# Altium PCB PCB3.PcbDoc
Units mm, origin at the board's own origin, x right, y up, seen from the top; angles counter-clockwise.
Board outline 19.13 x 24.3 mm, 2 copper layers (Top Layer, Bottom Layer); 16 components, 22 nets, 63 pads, 50 vias.
Unrouted connection lines stored in the file: 19.
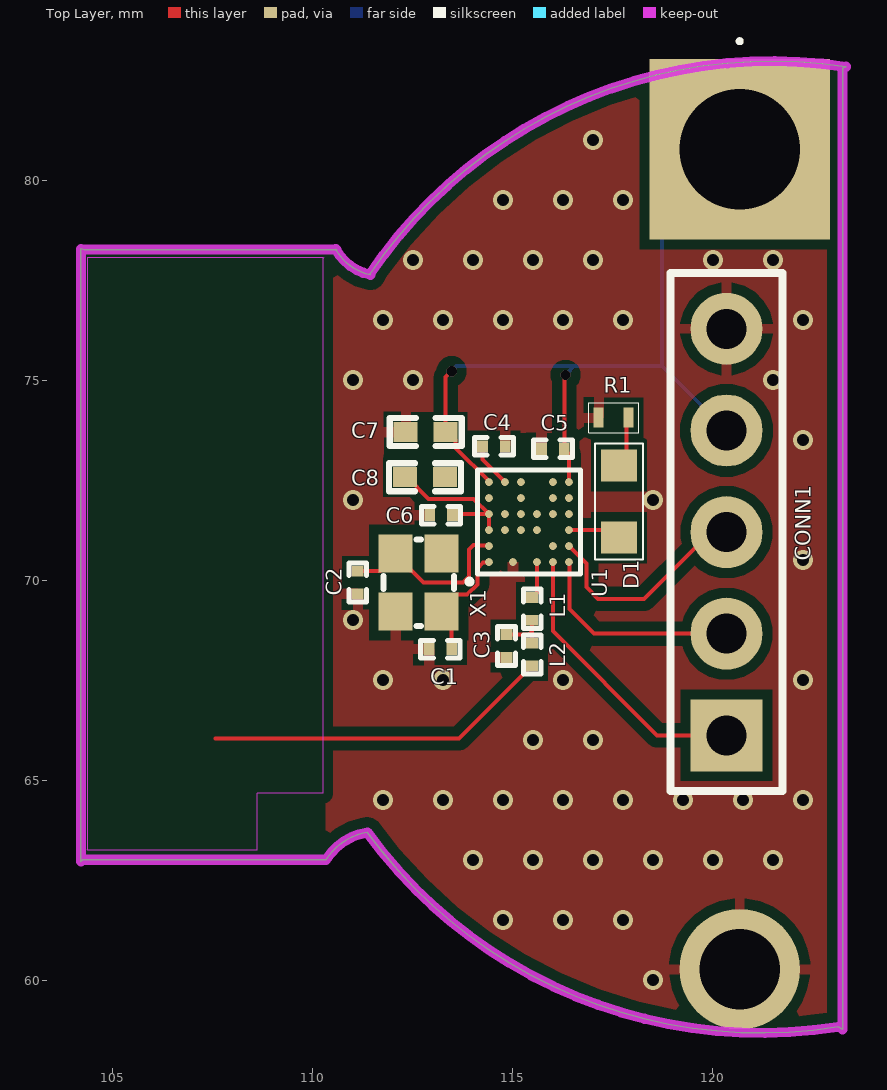
[diagram p0: Top Layer view]
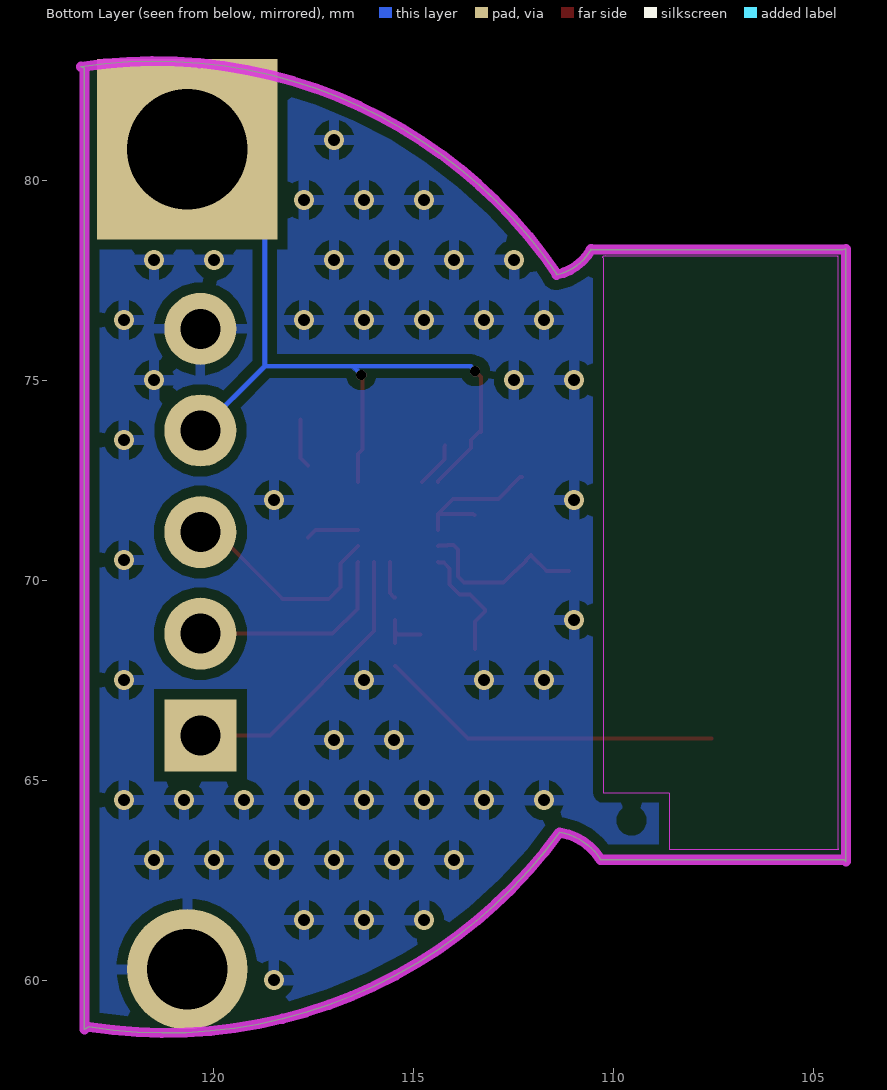
[diagram p1: Bottom Layer view, seen from below]
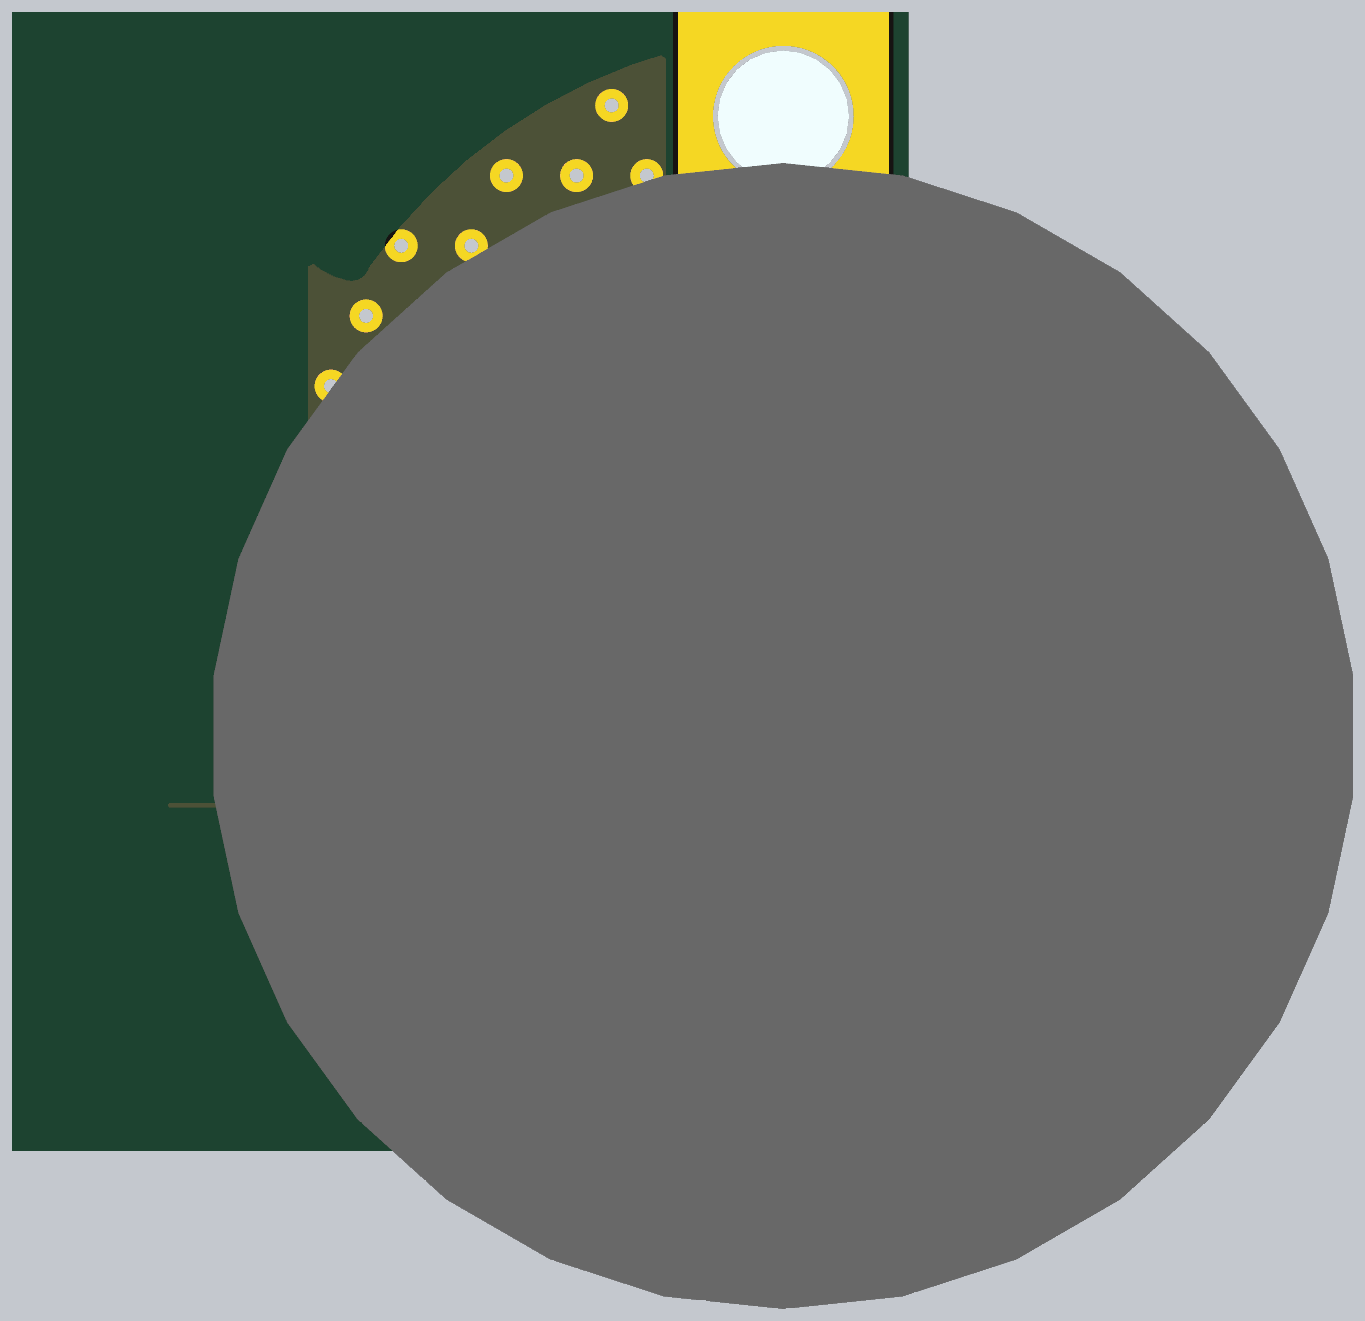
[diagram p2: 3D render of the assembled board from above, using the file's embedded part models]

## Layer stack, top to bottom
Top Solder: solder mask 0.0102, Solder Resist, Dk 3.5
Top Layer: signal copper 0.0356
Dielectric 1: dielectric 0.32, FR-4, Dk 4.8
Bottom Layer: signal copper 0.0356
Bottom Solder: solder mask 0.0102, Solder Resist, Dk 3.5

## Board outline
110.328,63.008 cw(c111.595,62.213) 111.36,63.69 ccw(c121.209,70.857) 123.123,58.828 123.24,58.77 123.24,82.8 123.325,82.83 ccw(c121.472,70.827) 111.426,77.653 111.437,77.634 cw(c111.69,78.89) 110.569,78.269 110.59,78.26 104.28,78.26 104.2,78.28 104.2,62.96 104.248,63.008

## Design rules (kind name [scope] priority, off if disabled: settings)
Clearance [All] p1: gap=0.254 ignorepadtopadclearanceinfootprint=FALSE except(0: Arc-Hole Track-Hole SMDPad-Hole THPad-Hole Via-Hole Fill-Hole Poly-Hole Region-Hole Text-Hole; 0.01: Arc-Arc Arc-Track Arc-SMDPad Track-Track Track-SMDPad SMDPad-SMDPad)
PolygonConnect [All] p1: connectstyle=Relief reliefconductorwidth=0.254 reliefentries=4 polygonreliefangle="90 Angle" airgapwidth=0.254
RoutingVias [All] p1: holewidth=0.3 width=0.5 viastyle="Through Hole" minholewidth=0.3 minwidth=0.4 maxholewidth=0.711 maxwidth=1.27
SolderMaskExpansion [All] p1: expansion=0.102 istentingtop=FALSE
Width [All] p1: maxlimit=0.2 minlimit=0.1 preferedwidth=0.1 minimp=50.000000 maximp=50.000000 favimp=50.000000
30 further rules are at their usual default settings.

## Classes and differential pairs
component class BLE_Schematic: C1 C2 C3 C4 C5 C6 C7 C8 CONN1 D1 L1 L2 R1 U1 X1

## Components (designator, comment, footprint, x,y, rotation, side; value= is the part's Value field where it differs from the comment)
BT1 "CR2477-HFN" CR2477HFN 120.67,80.77 r90 top locked
C1 "12pF" CAPC0603X03L_C 113.185,68.27 r180 top
C2 "12pF" CAPC0603X03L_C 111.12,69.935 r270 top
C3 "12pF" CAPC0603X03L_C 114.84,68.35 r90 top
C4 "12pF" CAPC0603X03L_C 114.525,73.34 r180 top
C5 "12pF" CAPC0603X03L_C 116,73.279 r0 top
C6 "12pF" CAPC0603X03L_C 113.205,71.62 r0 top
C7 "2.2µF" CAPC1005X04L 112.82,73.7 r0 top
C8 "2.2µF" CAPC1005X04L 112.8,72.57 r180 top
CONN1 "Connector" "1x5x2.54 Pin Header TH V" 120.34,71.199 r90 top
D1 "Led_red" Led_smd_red 117.65,71.959 r90 top
L1 "2.2nH" INDC0603X03L_C 115.479,69.281 r270 top
L2 "2.2nH" INDC0603X03L_C 115.479,68.138 r270 top
R1 "330" Resistor_0402 117.52,74.06 r180 top
U1 "" BGA28C40P6X6_247X246X50 115.4,71.45 r90 top value=nRF52805-CAAA
X1 "32MHz" BT-XTAL_2016 112.645,69.935 r90 top

## Footprints (in the part's own frame and the unit in brackets; to place one, negate y for a bottom-side part, rotate by r counter-clockwise, add the part's x,y. Pads: shape width x height; smd on the part's side, far side on the other; paste and mask are expansions set on the pad)
"1x5x2.54 Pin Header TH V" [mm] "1x5x2.54 Pin Header TH V"
  rect 1.8x1.8 hole 1: 1(-5.08,0)
  round 1.8 hole 1: 2(-2.54,0) 3(0,0) 4(2.54,0) 5(5.08,0)
  silkscreen extent -6.48,-1.4 6.48,1.4, body extent -6.35,-1.27 6.35,1.27, height 8.55
BGA28C40P6X6_247X246X50 [mm]
  round 0.194 smd mask+0.05: A1(-1,1) A2(-0.6,1) A3(-0.2,1) A4(0.2,1) A5(0.6,1) A6(1,1) B3(-0.2,0.6) B4(0.2,0.6) B6(1,0.6) C1(-1,0.4) D3(-0.2,0.2) D4(0.2,0.2) D5(0.6,0.2) D6(1,0.2) E1(-1,-0.2) E3(-0.2,-0.2) E4(0.2,-0.2) F1(-1,-0.6) F2(-0.6,-0.6) F4(0.2,-0.6) F5(0.6,-0.6) F6(1,-0.6) G1(-1,-1) G2(-0.6,-1) G3(-0.2,-1) G4(0.2,-1) G5(0.6,-1) G6(1,-1)
  silkscreen extent -1.55,-1.29 1.3,1.55, body extent -1.23,-1.23 1.23,1.23, height 0.5
BT-XTAL_2016 [mm]
  rect 0.95x0.85 smd: 1(-0.725,-0.575) 2(0.725,-0.575) 3(0.725,0.575) 4(-0.725,0.575)
  silkscreen extent -1.08,-0.88 1.08,0.88, body extent -1.05,-0.85 1.05,0.85, height 0.56
CAPC0603X03L_C [mm]
  rect 0.27x0.3 smd: 1(-0.285,0) 2(0.285,0)
  silkscreen extent -0.49,-0.22 0.49,0.22, body extent -0.3,-0.15 0.31,0.15, height 0.3
CAPC1005X04L [mm]
  rect 0.6x0.5 smd: 1(-0.5,0) 2(0.5,0)
  silkscreen extent -0.9,-0.35 0.9,0.35, body extent -0.51,-0.25 0.51,0.25, height 0.5
CR2477HFN [mm]
  rect 4.515x4.515 hole 3.01: 1(0,0)
  round 3.015 hole 2.01: 2(-20.5,0)
  silkscreen extent 2.65,-0.05 2.75,0.05, body extent -25.5,-12.25 1.41,12.25, height 8.9
INDC0603X03L_C [mm]
  rect 0.27x0.3 smd: 1(-0.285,0) 2(0.285,0)
  silkscreen extent -0.49,-0.22 0.49,0.22, body extent -0.31,-0.16 0.31,0.16, height 0.26
Led_smd_red [mm]
  rect 0.8x0.9 smd: 1(0.9,0) 2(-0.9,0)
  silkscreen extent -1.45,-0.6 1.45,0.6
Resistor_0402 [mm] "0402"
  rect 0.25x0.5 smd: 1(-0.375,0) 2(0.375,0)
  silkscreen extent -0.63,-0.38 0.63,0.38

## Part data
BT1: "Battery", Manufacturer_Name=METREL, Datasheet Link=https://docs.rs-online.com/9312/0900766b8061c9c3.pdf, Height=8.8mm, Manufacturer_Part_Number=CR2477-HFN
C1 C2 C3 C4 C5 C6: library part CAP_0201, "Capacitor, NP0, ±2%", Part Number=C0201-12p, Footprint Doc=0201, LatestRevisionDate=2017-11-09, Pin Count=2, Published=2014-11-13, Publisher="Nordic Semiconductor"
C7 C8: library part CAP_0402, "Capacitor, X5R, ±20%", Part Number=C0402-2µ2, Footprint Doc=0402, LatestRevisionDate=2006-06-02, Pin Count=2, Published=2009-05-08, Publisher="Nordic Semiconductor"
CONN1: library part "Header 1x5"
L1 L2: library part IND_0201, "High frequency chip inductor ±5%", Part Number=L0201-2n2, Footprint Doc=0201, LatestRevisionDate=2013-04-10, Pin Count=2, Published=2013-04-10, Publisher="Nordic Semiconductor"
R1: library part Resistor
U1: library part nRF52805_CAAA, "Multi-protocol Bluetooth Low Energy, IEEE 802.15.4, ANT and 2.4GHz proprietary system-on-chip", Manufacturer="Nordic Semiconductor", Manufacturer Part Number=nRF52805-CAAA, Footprint Doc=WLCSP-28, LatestRevisionDate=2018-11-28, Part Number=nRF52805-CAAA, Pin Count=28, Published=2018-11-28, Publisher="Nordic Semiconductor"
X1: library part XTAL_SMD2016, "XTAL SMD 2016, 32MHz, Cl=8pF, Total Tol: ±40ppm", Part Number=XTAL_SMD2016_32MHz_8pF_General, Footprint Doc=XTAL_2016, LatestRevisionDate=2016-08-19, Pin Count=4, Published=2016-08-19, Publisher="Nordic Semiconductor"

## Via types
v1: diameter 0.5, hole 0.3, Top Layer to Bottom Layer, 48 vias
v2: diameter 0.254, hole 0.254, Top Layer to Bottom Layer, 2 vias

## Nets (pads, with @x,y where several pads share a name; then routed paths per layer and width w, separated by ;. In a path a pad name is that pad's centre, name@x,y a point inside that pad or via, vN(x,y) a via of type N, cw(c..) or ccw(c..) an arc to the next point about the centre after c; other vN are vias at no path point)
DEC1: C4.2 U1.B6 | length 1.2
  Top Layer w0.1: C4.2@114.22,73.36 C4.2 114.24,73.01 U1.B6
DEC4: C6.2 C8.2 U1.A3 U1.A4 | length 3.8
  Top Layer w0.1: C8.2 112.35,72.57 112.89,72.03 114.02,72.03 U1.A4 ; C6.2 113.52,71.65 U1.A4 ; U1.A3 U1.A4
GND: BT1.2 C1.2 C2.2 C3.1 C4.1 C5.1 C6.1 C7.1 C8.1 CONN1.5 R1.2 U1.B3 U1.B4 U1.C1 U1.D3 U1.D4 U1.E3 U1.E4 X1.2 X1.4
  other v1: 118.5,60 114.75,61.5 116.25,61.5 117.75,61.5 114,63 115.5,63 117,63 118.5,63 120,63 121.5,63 111.75,64.5 113.25,64.5 114.75,64.5 116.25,64.5 117.75,64.5 119.25,64.5 120.75,64.5 122.25,64.5 115.5,66 117,66 111.75,67.5 113.25,67.5 116.25,67.5 122.25,67.5 111,69 122.25,70.5 111,72 118.5,72 122.25,73.5 111,75 112.5,75 121.5,75 111.75,76.5 113.25,76.5 114.75,76.5 116.25,76.5 117.75,76.5 122.25,76.5 112.5,78 114,78 115.5,78 117,78 120,78 121.5,78 114.75,79.5 116.25,79.5 117.75,79.5 117,81
NetC3_2: C3.2 L1.2 L2.1 | length 1.2
  Top Layer w0.1: C3.2 115.405,68.635 115.479,68.71 ; L2.1 115.479,68.71 ; L1.2 115.479,68.71
NetD1_1: D1.1 R1.1 | length 1.2
  Top Layer w0.1: D1.1 117.84,73.049 R1.1@117.84,74.009
NetL1_1: L1.1 U1.E1 | length 0.9
  Top Layer w0.1: L1.1 115.494,69.566 115.6,69.672 U1.E1
P0.00/XL1: U1.D6
P0.01/XL2: U1.D5
P0.04/AIN2: U1.F5
P0.05/AIN3: U1.F6
P0.12: U1.G5
P0.14: U1.F4
P0.16: U1.G4
P0.18: D1.2 U1.G3 | length 1.3
  Top Layer w0.1: U1.G3 117.459,71.25 D1.2
P0.20: U1.F2
P0.21/RESET: CONN1.3 U1.G2 | length 5.5
  Top Layer w0.1: U1.G2 116.84,70.41 116.84,69.82 117.13,69.53 118.28,69.53 119.949,71.199 CONN1.3
RF: L2.2 | length 8.7
  Top Layer w0.1: 107.56,66.04 113.65,66.04 115.464,67.853 L2.2
SWCLK: CONN1.2 U1.G1 | length 5.4
  Top Layer w0.1: U1.G1 116.41,70.44 116.41,69.28 117.031,68.659 CONN1.2
SWDIO: CONN1.1 U1.F1 | length 7.1
  Top Layer w0.1: U1.F1 116,68.72 118.601,66.119 CONN1.1
VDD_nRF: BT1.1 C5.2 C7.2 CONN1.4 U1.A6 U1.G6 | length 20.2
  Top Layer w0.1: v2(113.47,75.22) 113.32,75.07 C7.2 113.37,73.7 113.57,73.5 113.57,73.3 114.4,72.47 U1.A6 ; v2@116.35,75.16 v2(116.317,75.127) 116.285,75.095 C5.2 116.285,73.264 116.4,73.149 U1.G6
  Bottom Layer w0.1: v2@113.45,75.21 113.59,75.35 116.53,75.35 ; v2@116.36,75.18 116.53,75.35 ; CONN1.4 118.729,75.35 ; BT1.1@120.59,80.8 118.729,78.939 118.729,75.35 ; 116.53,75.35 118.729,75.35
XC1: C1.1 U1.A1 X1.1 | length 3
  Top Layer w0.1: C1.1 113.47,68.96 X1.1 113.22,69.26 113.595,69.635 113.855,69.635 114.11,69.89 114.11,70.29 114.252,70.432 114.382,70.432 U1.A1
XC2: C2.1 U1.A2 X1.3 | length 4.5
  Top Layer w0.1: C2.1 111.68,70.22 112.07,70.61 112.07,70.63 112.2,70.5 112.2,70.48 112.445,70.235 112.465,70.235 112.76,69.94 113.751,69.94 113.81,69.999 113.81,70.001 113.9,70.091 113.9,70.76 114.01,70.87 114.155,70.87 114.157,70.868 114.382,70.868 U1.A2
pads on no net: U1.A5

## Polygon pours and split planes (outlines as drawn)
GND on Bottom Layer "BOTTOM GND" (solid, remove dead copper, pour order 1): 110.328,63.008 cw(c111.595,62.213) 111.36,63.69 ccw(c121.209,70.857) 123.123,58.828 123.24,58.77 123.24,82.8 123.325,82.83 ccw(c121.472,70.827) 111.426,77.653 111.437,77.634 cw(c111.69,78.89) 110.569,78.269 110.59,78.26 104.28,78.26 104.2,78.28 104.2,62.96 104.248,63.008
no net on Bottom Layer "NONET_L02_P000" (none, pour order 0): 113.414,75.246 ccw(c113.45,75.21) 113.486,75.174 113.611,75.3 116.408,75.3 116.324,75.216 ccw(c116.36,75.18) 116.396,75.144 116.551,75.3 118.708,75.3 120.304,73.703 ccw(c120.34,73.739) 120.39,73.739 ccw(c120.34,73.739) 120.375,73.775 118.779,75.371 118.779,78.918 120.626,80.764 ccw(c120.59,80.8) 120.64,80.8 ccw(c120.59,80.8) 120.554,80.836 118.693,78.974 ccw(c118.728,78.939) 118.678,78.939 118.678,75.4 113.59,75.4 ccw(c113.59,75.35) 113.554,75.385
GND on Top Layer "TOP GND" (solid, remove dead copper, pour order 2): 110.229,63.044 cw(c111.496,62.249) 111.261,63.726 ccw(c121.11,70.893) 123.024,58.864 123.141,58.806 123.141,82.836 123.226,82.866 ccw(c121.373,70.863) 111.327,77.688 111.338,77.67 cw(c111.591,78.926) 110.47,78.304 110.491,78.296 104.181,78.296 104.101,78.316 104.101,62.996 104.149,63.044

## Keep-outs
Top Layer:
  region: 108.6,63.245 104.37,63.245 104.36,63.255 104.37,63.265 104.37,78.075 110.25,78.075 110.27,78.055 110.25,78.035 110.25,64.665 108.61,64.665 108.6,64.655
Bottom Layer:
  region: 108.62,63.265 104.39,63.265 104.38,63.275 104.39,63.285 104.39,78.095 110.27,78.095 110.29,78.075 110.27,78.055 110.27,64.685 108.63,64.685 108.62,64.675
  region: 104.42,78.1 110.19,78.1 110.2,78.11
Keep-Out Layer:
  lines w0.254: 104.2,62.96 104.2,78.28 ; 104.248,63.008 110.328,63.008 cw(c111.595,62.213) 111.36,63.69 ccw(c121.209,70.857) 123.123,58.828 ; 104.28,78.26 105.855,78.26 109.085,78.26 110.59,78.26 ; 110.569,78.269 ccw(c111.69,78.89) 111.437,77.634 ; 111.426,77.653 cw(c121.472,70.827) 123.325,82.83 ; 123.24,58.77 123.24,64.717 123.24,76.612 123.24,82.8